# Altium PCB Current Loop.PcbDoc
Units mil, origin at the board's own origin, x right, y up, seen from the top; angles counter-clockwise.
Board outline 1300 x 815 mil, 2 copper layers (Top Layer, Bottom Layer); 17 components, 13 nets, 44 pads, 6 vias.
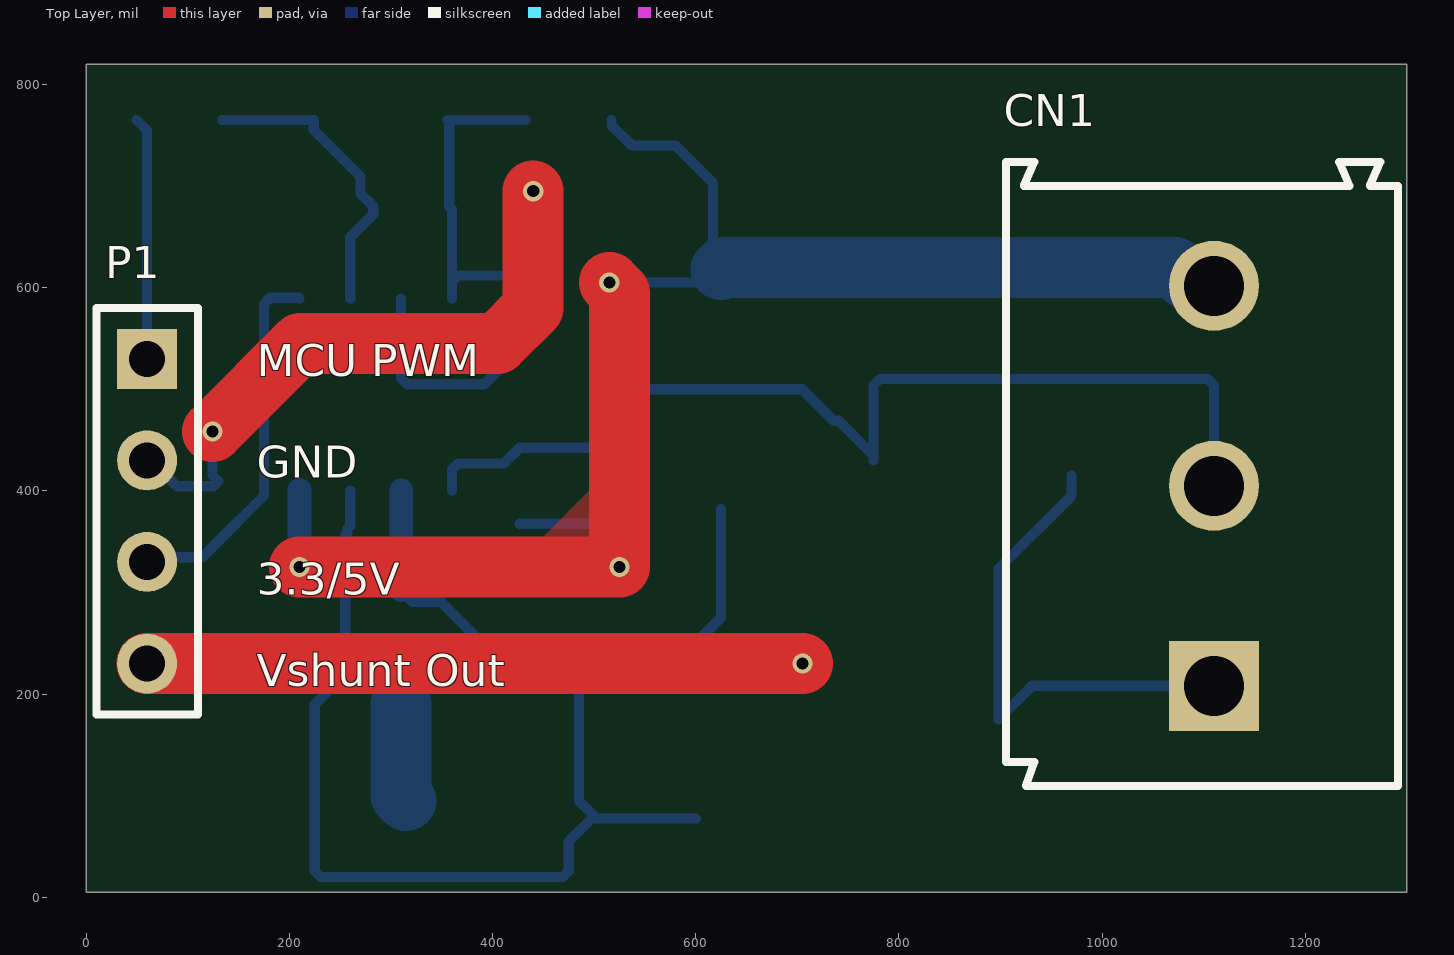
[diagram p0: Top Layer view]
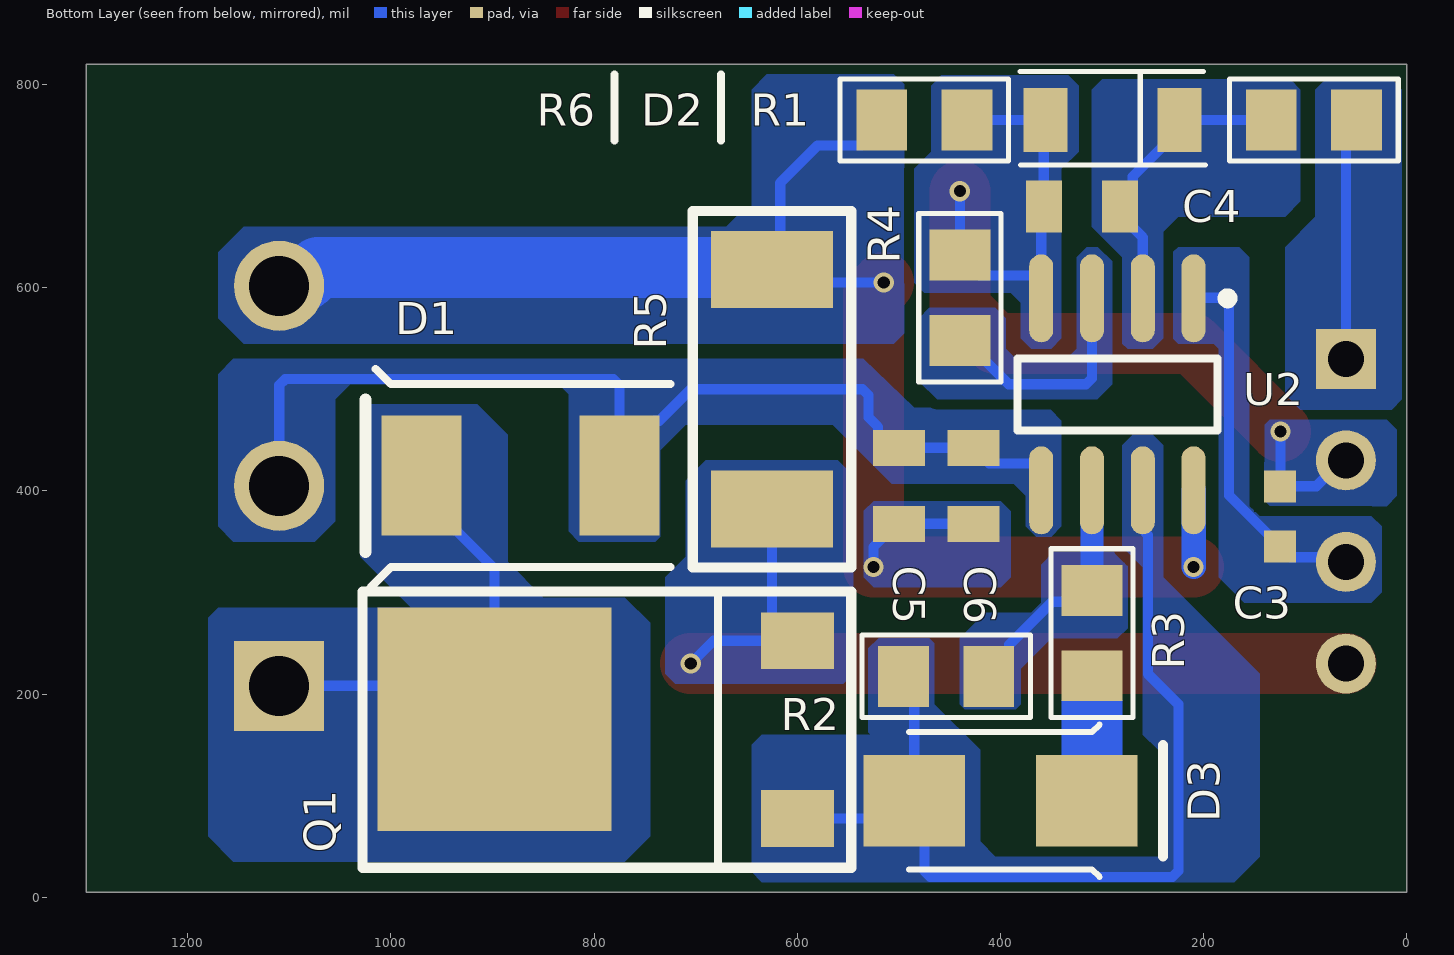
[diagram p1: Bottom Layer view, seen from below]
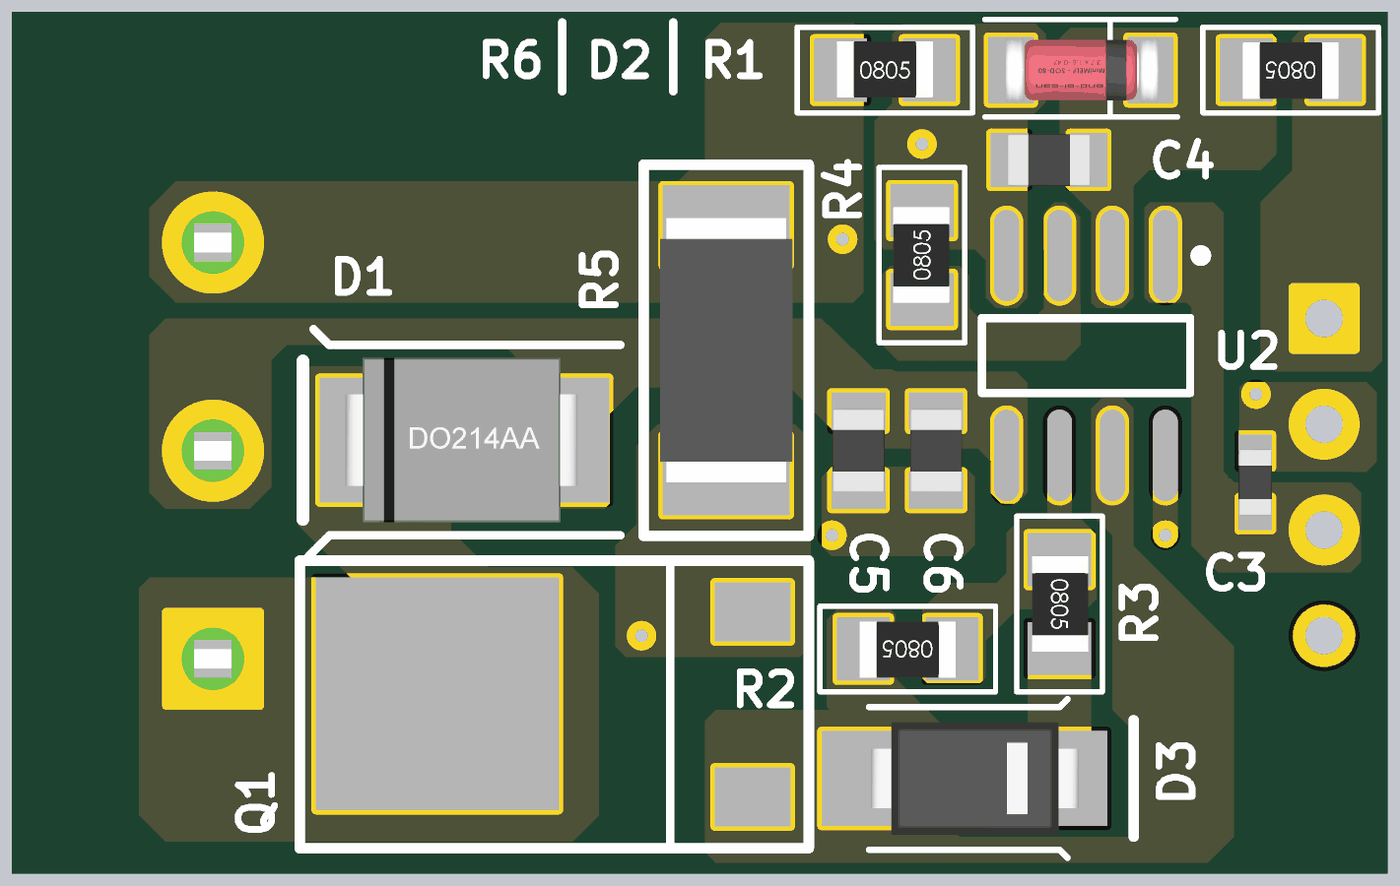
[diagram p2: 3D render of the assembled board from below, using the file's embedded part models]

## Layer stack, top to bottom
Top Solder: solder mask 0.4, Solder Resist, Dk 3.5
Top Layer: signal copper 1.4
Dielectric 1: dielectric 12.6, FR-4, Dk 4.8
Bottom Layer: signal copper 1.4
Bottom Solder: solder mask 0.4, Solder Resist, Dk 3.5

## Board outline
0,5 1300,5 1300,820 0,820

## Design rules (kind name [scope] priority, off if disabled: settings)
Clearance Clearance_1 [All] p1: gap=10 ignorepadtopadclearanceinfootprint=FALSE except(0: Arc-Hole Track-Hole SMDPad-Hole THPad-Hole Via-Hole Fill-Hole Poly-Hole Region-Hole Text-Hole)
Clearance [All] p2: gap=5 ignorepadtopadclearanceinfootprint=FALSE except(0: Arc-Hole Track-Hole SMDPad-Hole THPad-Hole Via-Hole Fill-Hole Poly-Hole Region-Hole Text-Hole)
MinimumSolderMaskSliver [All] p1: minsoldermaskwidth=5
PlaneConnect [All] p1: planeconnectstyle=Direct reliefexpansion=20 reliefentries=4 reliefconductorwidth=10 reliefairgap=10
PolygonConnect [All] p1: connectstyle=Direct reliefconductorwidth=10 reliefentries=4 polygonreliefangle="90 Angle" airgapwidth=10
RoutingVias [All] p1: holewidth=28 width=50 viastyle="Through Hole" minholewidth=28 minwidth=20 maxholewidth=28 maxwidth=100
SilkToSilkClearance [All] p1: silktosilkclearance=5
SilkToSolderMaskClearance [IsPad] p1: minsilkscreentomaskgap=2 clearancetoexposedcopper=TRUE
SolderMaskExpansion [All] p1: expansion=4 istentingtop=FALSE
Width [All] p1: maxlimit=200 minlimit=10 preferedwidth=10 minimp=50.000000 maximp=50.000000 favimp=50.000000
26 further rules are at their usual default settings.

## Components (designator, comment, footprint, x,y, rotation, side; value= is the part's Value field where it differs from the comment)
C3 "NM" WCAP-CSGP_0603_H=0.8mm_Reflow 125,375 r270 bottom
C4 "47pF, 50V" WCAP-CSGP_0805_H=0.6mm_Reflow 320,680 r180 bottom
C5 "100nF, 25V" WCAP-CSGP_0805_H=0.8mm_Reflow 500,405 r90 bottom
C6 "1uF, 25V" WCAP-CSGP_0805_H=1.25mm 426.59,405 r90 bottom
CN1 "691216710003" 691216710003 1098.19,405 r90 top
D1 "SMB" SMB 875,415 r180 bottom
D2 "5V6" SOD80 290,765 r0 bottom
D3 "SMA_Schottky" SMA 400,95 r0 bottom
P1 "Header 4" HDR1X4 60,530 r270 top
Q1 "STD30NF06LT4" NFET_DPAK 749,165 r0 bottom
R1 "470R" SM/R_0805 91.56,765 r0 bottom
R2 "22R" SM/R_0805 453.5,217.5 r0 bottom
R3 "4R7" SM/R_0805 310,260 r270 bottom
R4 "?R" SM/R_0805 440,590 r90 bottom
R5 "1R - 2W" SM/R_2512 625,500 r270 bottom
R6 "NM" SM/R_0805 475,765 r180 bottom
U2 "STGAP2SICSN" SO8_N 285,495 r270 bottom

## Footprints (in the part's own frame and the unit in brackets; to place one, negate y for a bottom-side part, rotate by r counter-clockwise, add the part's x,y. Pads: shape width x height; smd on the part's side, far side on the other; paste and mask are expansions set on the pad)
691216710003 [mm] "Serie 2167 - 5.00 mm _ 3 pins"
  rect 2.25x2.25 hole 1.5: 1(-5,-0.3)
  round 2.25 hole 1.5: 2(0,-0.3) 3(5,-0.3)
  silkscreen extent -7.5,-4.9 8.1,4.9, body extent -7.5,-4.9 8.1,4.9, height 13.85
HDR1X4 [mm] "Connector; Header; 4 Position"
  rect 1.5x1.5 hole 0.9: 1(0,0)
  round 1.5 hole 0.9: 2(2.54,0) 3(5.08,0) 4(7.62,0)
  silkscreen extent -1.27,-1.27 8.89,1.27
NFET_DPAK [mil]
  rect 230x220 smd: D(149,-10)
  rect 72x56 smd: G(-149,87.5) S(-149,-87.5)
  silkscreen extent -202,-136 279,136
SM/R_0805 [mil]
  rect 50x60 smd: 1(-42,0) 2(42,0)
  silkscreen extent -83,-40 83,40, body extent -45,-26 45,27, height 30
SM/R_2512 [mil]
  rect 76x120 smd: 1(-118,0) 2(118,0)
  silkscreen extent -176,-78 176,78, body extent -125,-63 125,63, height 20
SMA [mil]
  rect 100x90 smd: A(85,0) K(-85,0)
  silkscreen extent -160,-75 90,75, body extent -108,-53 88,53, height 95
SMB [mm]
  rect 2x3 smd: A(-2.413,0) K(2.54,0)
  silkscreen extent -3.81,-2.79 3.81,2.67, body extent -2.79,-1.97 2.79,1.97, height 2.6
SO8_N [mm] "SOIC, 8-Leads, Body 4.9x3.9mm, Pitch 1.27mm, IPC Medium Density"
  oval 2.2x0.6 smd: 1(-2.4,1.905) 2(-2.4,0.635) 3(-2.4,-0.635) 4(-2.4,-1.905) 5(2.4,-1.905) 6(2.4,-0.635) 7(2.4,0.635) 8(2.4,1.905)
  silkscreen extent -2.52,-2.5 0.9,2.88, body extent -2,-2.5 2,2.5, height 1.75
SOD80 [mm] "LL4148"
  rect 1.1x1.6 smd: A(1.675,0) K(-1.675,0)
  silkscreen extent -2.32,-1.22 2.3,1.13, body extent -1.88,-0.8 1.82,0.8, height 1.6
WCAP-CSGP_0603_H=0.8mm_Reflow [mm] "Ceramic Capacitors, body 1.6x0.8mm"
  rect 0.8x0.8 smd: 1(-0.75,0) 2(0.75,0)
  body extent -0.8,-0.4 0.8,0.4, height 0.8
WCAP-CSGP_0805_H=0.6mm_Reflow [mm] "Ceramic Capacitors, body 2x1.25mm"
  rect 0.9x1.3 smd: 1(-0.95,0) 2(0.95,0)
  body extent -1,-0.62 1,0.63, height 0.6
WCAP-CSGP_0805_H=0.8mm_Reflow [mm] "Ceramic Capacitors, body 2x1.25mm"
  rect 0.9x1.3 smd: 1(-0.95,0) 2(0.95,0)
  body extent -1,-0.62 1,0.63, height 0.8
WCAP-CSGP_0805_H=1.25mm [mm] "Ceramic Capacitors, body 2x1.25mm"
  rect 0.9x1.3 smd: 1(-0.95,0) 2(0.95,0)
  body extent -1,-0.62 1,0.63, height 1.25

## Part data
C3: library part 885012206071, "WCAP-CSGP Multilayer Ceramic Chip Capacitor, General Purpose, size 0603, X7R, 100nF, 25V", Capacitance=100nF, Capacitance Tolerance=+/-10%, Isolation Resistance=>=5GOhm, Manufacturer="Wurth Elektronik", Operating Temperature="-55 to +125degC", Rated Voltage=25VDC, Ceramic Type=X7R, ComponentLink1Description=Manufacturer, ComponentLink1URL=http://www.we-online.de, ComponentLink2Description=Datasheet, ComponentLink2URL=https://www.we-online.com/catalog/datasheet/885012206071.pdf, Dissipation Factor=#NAME?, Height=0.8mm, Manufacturer Part Number=885012206071, Mounting Technology=SMT, Packaging="Tape and Reel", Published Date="May 2020", Size=0603, Technical Reference=X7R0603104K025DFCT10000
C4: library part 885012007055, "WCAP-CSGP Multilayer Ceramic Chip Capacitor, General Purpose, size 0805, NP0, 47pF, 50V", Capacitance=47pF, Capacitance Tolerance=+/-5%, Isolation Resistance=>=10GOhm, Manufacturer="Wurth Elektronik", Operating Temperature="-55 to +125degC", Rated Voltage=50VDC, Ceramic Type=NP0, ComponentLink1Description=Manufacturer, ComponentLink1URL=http://www.we-online.de, ComponentLink2Description=Datasheet, ComponentLink2URL=https://www.we-online.com/catalog/datasheet/885012007055.pdf, Dissipation Factor=Q>=1000, Height=0.6mm, Manufacturer Part Number=885012007055, Mounting Technology=SMT, Packaging="Tape and Reel", Published Date="May 2020", Size=0805, Technical Reference=NP00805470J050DFCT10000
C5: library part 885012207072, "WCAP-CSGP Multilayer Ceramic Chip Capacitor, General Purpose, size 0805, X7R, 100nF, 25V", Capacitance=100nF, Capacitance Tolerance=+/-10%, Isolation Resistance=>=5GOhm, Manufacturer="Wurth Elektronik", Operating Temperature="-55 to +125degC", Rated Voltage=25VDC, Ceramic Type=X7R, ComponentLink1Description=Manufacturer, ComponentLink1URL=http://www.we-online.de, ComponentLink2Description=Datasheet, ComponentLink2URL=https://www.we-online.com/catalog/datasheet/885012207072.pdf, Dissipation Factor=#NAME?, Height=0.8mm, Manufacturer Part Number=885012207072, Mounting Technology=SMT, Packaging="Tape and Reel", Published Date="May 2020", Size=0805, Technical Reference=X7R0805104K025DFCT10000
C6: library part 885012207078, "WCAP-CSGP Multilayer Ceramic Chip Capacitor, General Purpose, size 0805, X7R, 1uF, 25V", Capacitance=1uF, Capacitance Tolerance=+/-10%, Isolation Resistance=>=0.5GOhm, Manufacturer="Wurth Elektronik", Operating Temperature="-55 to +125degC", Rated Voltage=25VDC, Ceramic Type=X7R, ComponentLink1Description=Manufacturer, ComponentLink1URL=http://www.we-online.de, ComponentLink2Description=Datasheet, ComponentLink2URL=https://www.we-online.com/catalog/datasheet/885012207078.pdf, Dissipation Factor=#NAME?, Height=1.25mm, Manufacturer Part Number=885012207078, Mounting Technology=SMT, Packaging="Tape and Reel", Published Date="May 2020", Size=0805, Technical Reference=X7R0805105K025DFCT10000
CN1: "WR-TBL Serie 2167 Horizontal Entry Modular, Rising Cage Clamp, pitch 5mm, 3p", Operating Temperature="-30 to +120degC", Rated Current [UL]=14A, Working Voltage [UL]=300VAC, Application="Rising Cage Clamp", Compliance="Lead free / RoHS;​ ROHS & Reach", ComponentLink1Description=Manufacturer, ComponentLink1URL=http://www.we-online.de, ComponentLink2Description=Datasheet, ComponentLink2URL=https://katalog.we-online.de/em/datasheet/691216710003.pdf, Modularity=Yes, Mounting Technology=THT, Packaging=Box, Part Number=691216710003, PCB/Cable/Panel=PCB, Pin Number=3, Pitch=5mm, Published Date="October 2019", Publisher="Wurth Elektronik", Type=Horizontal
D1: Manufacturer=STMicroelectronics
D2: library part SOD80_zener
D3: Package/Class=SM, Value/Generic Part Number="Schottky Diode"
P1: "Header, 4-Pin", LatestRevisionDate=17-Jul-2002, LatestRevisionNote="Re-released for DXP Platform.", Publisher="Altium Limited"
Q1: library part NFET, Manufacturer=STMicroelectronics, Package/Class=SM, Value/Generic Part Number=NFET_DPAK, Mfg P/N=NFET_D2PAK
R1 R2 R3 R4 R6: library part SMRes, Resistor Type="FIXED RESISTOR", Category="Chip SMD Resistors", Mount="Surface Mount", Mounting=SMD, Number of Pins=2, Pricing 1="10=0.67400, 100=0.52000, 250=0.49300, 500=0.33100, 1000=0.28900 (USD)", RoHS=Yes, Stock 1=1
R5: library part SMRes, Mounting=SMD
U2: library part STGAP2S, "Galvanically isolated 4 A single gate driver"

## Via types
v1: diameter 20, hole 12.01, Top Layer to Bottom Layer, 6 vias

## Nets (pads, with @x,y where several pads share a name; then routed paths per layer and width w, separated by ;. In a path a pad name is that pad's centre, name@x,y a point inside that pad or via, vN(x,y) a via of type N, cw(c..) or ccw(c..) an arc to the next point about the centre after c; other vN are vias at no path point)
3.3V: C3.2 P1.3 U2.1 | length 368.4
  Bottom Layer w10: P1.3 64.72,334.72 114.25,334.72 C3.2 175,395.47 175,584.14 180.86,590 209.49,590 U2.1
+24: C5.2 C6.2 CN1.2 D1.K U2.5 | length 1025.6
  Bottom Layer w10: U2.5 360,420.72 366.29,427.01 411.35,427.01 426.74,442.4 C5.2 507.87,442.4 520.59,455.12 520.59,462.99 530,472.4 530,494.14 535.86,500 705,500 735.95,469.05 740.63,469.05 D1.K@775,434.68 ; D1.K@775,430 D1.K@775,434.68 ; CN1.2 1110,504.14 1104.14,510 780.86,510 775,504.14 D1.K@775,434.68
A0: P1.4 Q1.S R5.2 | length 898.3
  Top Layer w60: P1.4 v1(705,230)
  Bottom Layer w10: Q1.S Q1.S@602,252.5 ; R5.2 625,275.5 Q1.S@602,252.5 ; v1(705,230) 682.5,252.5 Q1.S@602,252.5
GATE: D3.A Q1.G R2.2 U2.7 | length 959.1
  Bottom Layer w10: U2.7 260,365.33 257.39,362.72 257.39,358.74 255,356.35 255,220 225,190 225,25.86 230.86,20 469.14,20 475,25.86 475,55 497.5,77.5 D3.A@502.5,77.5 ; R2.2 485,207 D3.A D3.A@502.5,77.5 ; Q1.G D3.A@502.5,77.5
GD-: C5.1 C6.1 CN1.3 R5.1 R6.1 U2.8 | length 1650.8
  Top Layer w60: v1(210,325) v1(525,325) 525,595 v1(515,605)
  Bottom Layer w10: C6.1 C5.1 502.28,367.6 525,344.88 v1(525,325) ; v1(515,605) 612,605 R5.1 ; R6.1 517,760 537,740 580,740 616.86,703.14 616.86,626.14 R5.1 ; R5.1@641.15,601.85 R5.1
  Bottom Layer w24: v1(210,325) U2.8
  Bottom Layer w60: R5.1 627,620 1071.64,620 1084.32,607.32 1104.53,607.32 CN1.3
NetC4_2: C4.2 D2.K R1.2 U2.2 | length 299.6
  Bottom Layer w10: R1.2 D2.K 224.06,755.16 269.88,709.33 269.88,692.72 C4.2 282.6,672.13 260,649.53 U2.2
NetCN1_1: CN1.1 D1.A Q1.D | length 495.6
  Bottom Layer w10: D1.A 970,395.32 898,323.32 Q1.D 931.15,208.15 CN1.1
NetD3_K: D3.K R3.2 | length 97.1
  Bottom Layer w60: 310,190 310,100 D3.K
NetR2_1: R2.1 R3.1 U2.6 | length 241.5
  Bottom Layer w10: R3.1 321.14,290.86 349.14,290.86 391.5,248.5 391.5,237.5 R2.1
  Bottom Layer w23: R3.1 U2.6
NetR4_1: R4.1 U2.3 | length 228.9
  Bottom Layer w10: U2.3 310,510.86 315.86,505 392,505 435,548 R4.1
PRE_GATE: P1.1 R1.1 | length 239.3
  Bottom Layer w10: R1.1 60,754.56 P1.1
Signal_Ref: C3.1 C4.1 D2.A P1.2 R4.2 R6.2 U2.4 | length 1022.9
  Top Layer w60: v1(124.37,458.5) 210.87,545 404.85,545 440,580.15 v1(440,695)
  Bottom Layer w10: P1.2 63.74,430 89.21,404.53 C3.1 130,409.53 124.37,415.16 v1(124.37,458.5) ; U2.4 U2.4@360,605.71 ; R6.2 D2.A 357.4,763.54 C4.1 360,677.4 U2.4@360,605.71 ; v1(440,695) R4.2 420,612 366.29,612 U2.4@360,605.71
VCC: 

## Polygon pours and split planes (outlines as drawn)
GATE on Bottom Layer "GATE_L02_P009" (solid, pour order 9): 420,15 170,15 145,40 145,220 240,315 240,445 250,455 270,455 280,445 280,345 260,325 260,160 245,145 245,40 405,40 420,55 420,140 420,145 465,190 465,250 470,255 520,255 530,245 530,162.5 527.5,160 635,160 645,150 645,25 635,15
NetR2_1 on Bottom Layer "NETR2_1_L02_P013" (solid, pour order 13): 347.5,340 360,327.5 360,290 370,280 415,280 440,255 440,190 435,185 385,185 380,190 380,225 350,255 285,255 275,265 275,330 285,340
+24 on Bottom Layer "+24_L02_P012" (solid, pour order 12): 505,407.01 507.01,407.01 565,465 710,465 735,440 735,355 740,350 815,350 825,360 825,495 835,505 1040,505 1055,490 1055,370 1075,350 1155,350 1170,365 1170,515 1155,530 535,530 485,482.01 352.99,482.01 340,469.02 340,365 350,355 365,355 375,365 375,395 387.01,407.01
NetR4_1 on Bottom Layer "NETR4_1_L02_P011" (solid, pour order 11): 395,540 385,530 335,530 325,540 325,630 315,640 300,640 290,630 290,505 305,490 462.5,490 480,507.5 480,570 470,580 405,580 395,570
GD- on Bottom Layer "GD-_L02_P010" (solid, pour order 10): 535,315 525,305 400,305 390,315 390,380 400,390 525,390 535,380
A0 on Bottom Layer "A0_L02_P008" (solid, pour order 8): 720,210 730,220 730,315 710,335 710,410 690,430 560,430 545,415 545,220 555,210
NetCN1_1 on Bottom Layer "NETCN1_1_L02_P007" (solid, pour order 7): 1105,285 980,285 1030,335 1030,475 1020,485 915,485 885,455 885,330 850,295 770,295 745,270 745,60 770,35 1155,35 1180,60 1180,275 1170,285
GD- on Bottom Layer "GD-_L02_P006" (solid, pour order 6): 495,800 505,810 630,810 645,795 645,680 650,680 670,660 1145,660 1170,635 1170,570 1145,545 505,545 495,555
3.3V on Bottom Layer "3.3V_L02_P003" (solid, pour order 3): 155,630 165,640 225,640 230,635 230,550 225,545 190,545 185,540 185,315 160,290 35,290 25,300 25,365 35,375 145,375 155,385
Signal_Ref on Bottom Layer "SIGNAL_REF_L02_P004" (solid, pour order 4): 10,395 20,385 135,385 145,395 145,460 135,470 20,470 10,460
PRE_GATE on Bottom Layer "PRE_GATE_L02_P002" (solid, pour order 2): 90,670 120,640 120,495 105,480 15,480 5,490 5,795 15,805 80,805 90,795
NetC4_2 on Bottom Layer "NETC4_2_L02_P001" (solid, pour order 1): 280,630 310,660 310,795 300,805 115,805 105,795 105,730 105,685 120,670 225,670 240,655 240,550 250,540 275,540 280,545
Signal_Ref on Bottom Layer "SIGNAL_REF_L02_P000" (solid, pour order 0): 323.18,733.91 340,717.08 340,550 350,540 370,540 380,550 380,585 390,595 475,595 485,605 485,717.08 468.18,733.91 468.18,798.91 458.18,808.91 333.18,808.91 323.18,798.91
GD- on Top Layer "GD-_L01_P005" (solid, pour order 5): 440,345 505,410 515,410 515,325 440,325

## Silkscreen, mask and mechanical layers (free items; w line width, h text height)
Top Overlay:
  text "MCU PWM" at 167.87,512.87 h31.5
  text "GND" at 167.87,412.87 h31.5
  text "3.3/5V" at 167.87,297.87 h31.5
  text "Vshunt Out" at 167.87,207.87 h31.5
Bottom Overlay:
  lines w7.87: 675,745 675,810 ; 780,745 780,810
Mechanical 1:
  the board outline again, w0.39